# Altium PCB ESP32_PCB.PcbDoc (part 2 of 2)
Units mm, origin at the board's own origin, x right, y up, seen from the top; angles counter-clockwise.
Board outline 63.5 x 20.32 mm, 4 copper layers (Top Layer, Layer 1, Layer 2, Bottom Layer), stack 0.603 mm thick; 45 components, 48 nets, 214 pads, 74 vias.
Unrouted connection lines stored in the file: 1.
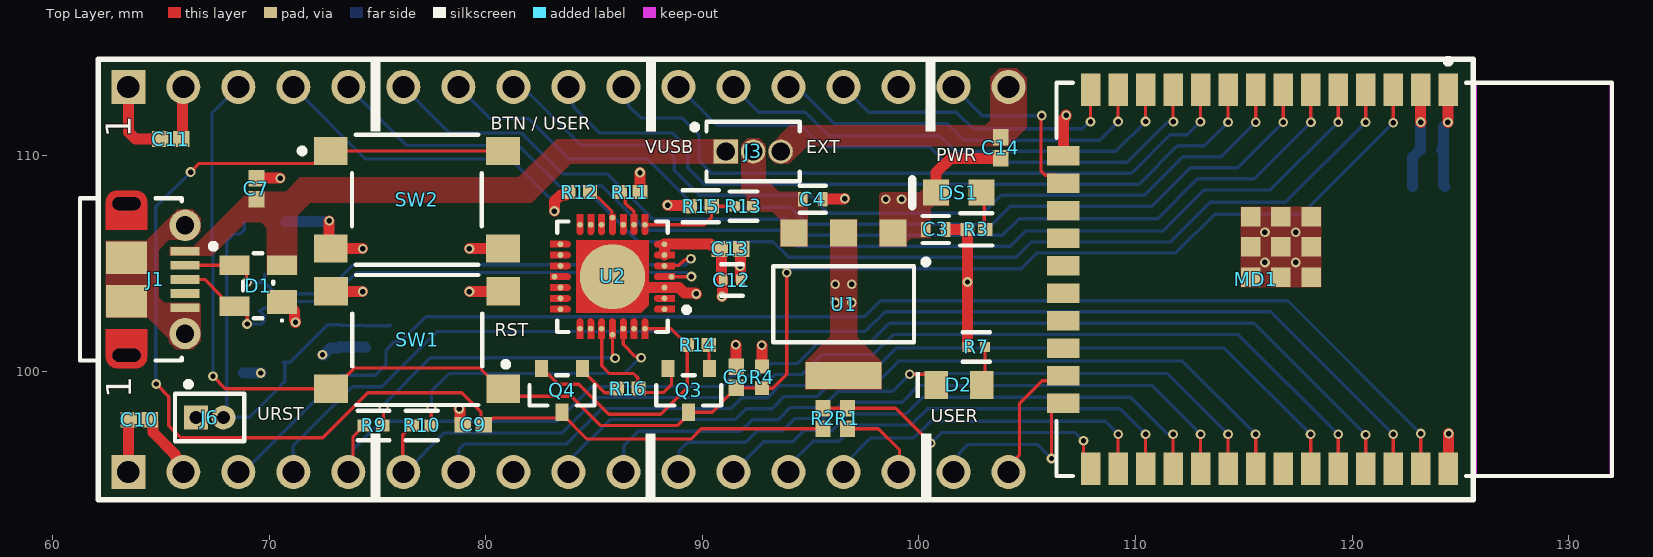
[diagram p0: Top Layer view]

## Polygon pours and split planes (outlines as drawn) (continued)
+5V_EXT on Top Layer "GND_L01_P-001" (solid, remove dead copper, pour order 11): 94.05,111.375 93.075,110.4 93.075,109.9 93.375,109.6 94.025,109.6 94.85,110.425 104.125,110.425 104.975,111.275 104.975,113.575 104.525,114.025 103.725,114.025 103.3,113.6 103.3,111.6 103.075,111.375
+5V_VBUS on Top Layer "+5V_VBUS_L01_P012" (solid, pour order 12): 65.425,105.35 67.375,105.35 68.925,106.9 69.63,106.9 69.9,106.63 69.9,104.475 71.3,104.475 71.3,107.2 71.9,107.8 82.125,107.8 83.925,109.6 91.65,109.6 91.65,110.75 83.275,110.75 81.5,108.975 71.425,108.975 70.775,108.325 69.05,108.325 66.5,105.775 65.425,105.775
GND on Top Layer "GND_L01_P016" (solid, pour order 16): 65.7,101.05 66.475,101.05 66.85,101.425 66.85,103.125 66.775,103.2 65.15,103.2 64.9,103.45 64.9,105.625 65.375,106.1 66.475,106.1 66.85,106.475 66.85,107.125 66.475,107.5 65.775,107.5 65.375,107.1 65.325,107.05 65.275,107 64.325,106.05 62.45,106.05 62.45,102.525 62.475,102.5 64.4,102.5 65.375,101.525 65.375,101.375
+3V3 on Layer 1 (split plane): 125.093,94.617 62.613,94.617 62.613,113.917 125.093,113.917
GND on Layer 2 (split plane): 125.093,94.617 62.613,94.617 62.613,113.917 125.093,113.917

## Silkscreen, mask and mechanical layers (free items; w line width, h text height)
Top Overlay:
  rectangle: 100.1,94.1 100.575,97.15
  rectangle: 87.375,94.1 87.85,97.15
  rectangle: 74.675,94.1 75.15,97.15
  rectangle: 100.3,111.099 100.775,114.425
  rectangle: 87.4,111.1 87.875,114.425
  rectangle: 74.675,111.1 75.15,114.425
  lines w0.254: 62.103,94.107 125.603,94.107 125.603,114.427 62.103,114.427 62.103,94.107
  text "BTN / USER" at 80.225,110.962 h1
  text "1" at 64,110.8 h2 r90
  text "VUSB" at 87.375,109.887 h1
  text "EXT" at 94.8,109.875 h1
  text "PWR" at 100.8,109.525 h1
  text "RST" at 80.425,101.437 h1
  text "1" at 64.025,98.775 h2 r90
  text "URST" at 69.45,97.562 h1
  text "USER" at 100.55,97.462 h1
Bottom Overlay:
  text "GND" at 63.757,111.25 h1.5 r90
  text "+3V3" at 66.482,111.25 h1.5 r90
  text "EN" at 69.075,111.25 h1.5 r90
  text "IO36" at 71.682,111.25 h1.5 r90
  text "IO39" at 74.257,111.25 h1.5 r90
  text "IO34" at 76.707,111.25 h1.5 r90
  text "IO35" at 79.282,111.25 h1.5 r90
  text "IO32" at 81.682,111.25 h1.5 r90
  text "IO33" at 84.257,111.25 h1.5 r90
  text "IO25" at 86.832,111.25 h1.5 r90
  text "IO26" at 89.407,111.25 h1.5 r90
  text "IO27" at 91.932,111.25 h1.5 r90
  text "IO14" at 94.507,111.25 h1.5 r90
  text "IO12" at 97.107,111.25 h1.5 r90
  text "GND" at 99.682,111.25 h1.5 r90
  text "IO13" at 102.207,111.25 h1.5 r90
  text "+5V_EXT" at 104.535,111.25 h1.5 r90
  text "RXD0" at 76.557,100.7 h1.5 r90
  text "TXD0" at 74.182,100.6 h1.5 r90
  text "+3V3" at 64.032,100.35 h1.5 r90
  text "GND" at 66.482,100.125 h1.5 r90
  text "GND" at 81.732,100.125 h1.5 r90
  text "IO23" at 69.032,100.05 h1.5 r90
  text "IO16" at 94.432,100.05 h1.5 r90
  text "IO15" at 104.657,100.05 h1.5 r90
  text "IO22" at 71.532,100.025 h1.5 r90
  text "IO19" at 84.282,100.025 h1.5 r90
  text "IO18" at 86.807,100.025 h1.5 r90
  text "IO17" at 91.882,100.025 h1.5 r90
  text "IO21" at 79.207,99.875 h1.5 r90
  text "2023 (C)" at 121.945,99.776 h3 r270
  text "IO4" at 97.032,99.325 h1.5 r90
  text "IO5" at 89.357,99.3 h1.5 r90
  text "IO0" at 99.557,99.275 h1.5 r90
  text "IO2" at 102.057,99.275 h1.5 r90
  text "RAY GUZMAN" at 118.932,97.104 h2.5 r270

## Dimensions
63.5,113.157 to 63.5,95.377 on Top Overlay

## Text inside footprints (layer, text, board x,y; h text height)
J1: Mechanical 1 "PCB EDGE" at 61.87,111.467 h0.3 r270